# Altium PCB Copy of corePCB1.PcbDoc (part 1 of 2)
Units mil, origin at the board's own origin, x right, y up, seen from the top; angles counter-clockwise.
Board outline 6000 x 4000 mil, 4 copper layers (Top Layer, Layer 1, Layer 2, Bottom Layer), stack 23.756 mil thick; 90 components, 166 nets, 637 pads, 207 vias.
Unrouted connection lines stored in the file: 273.
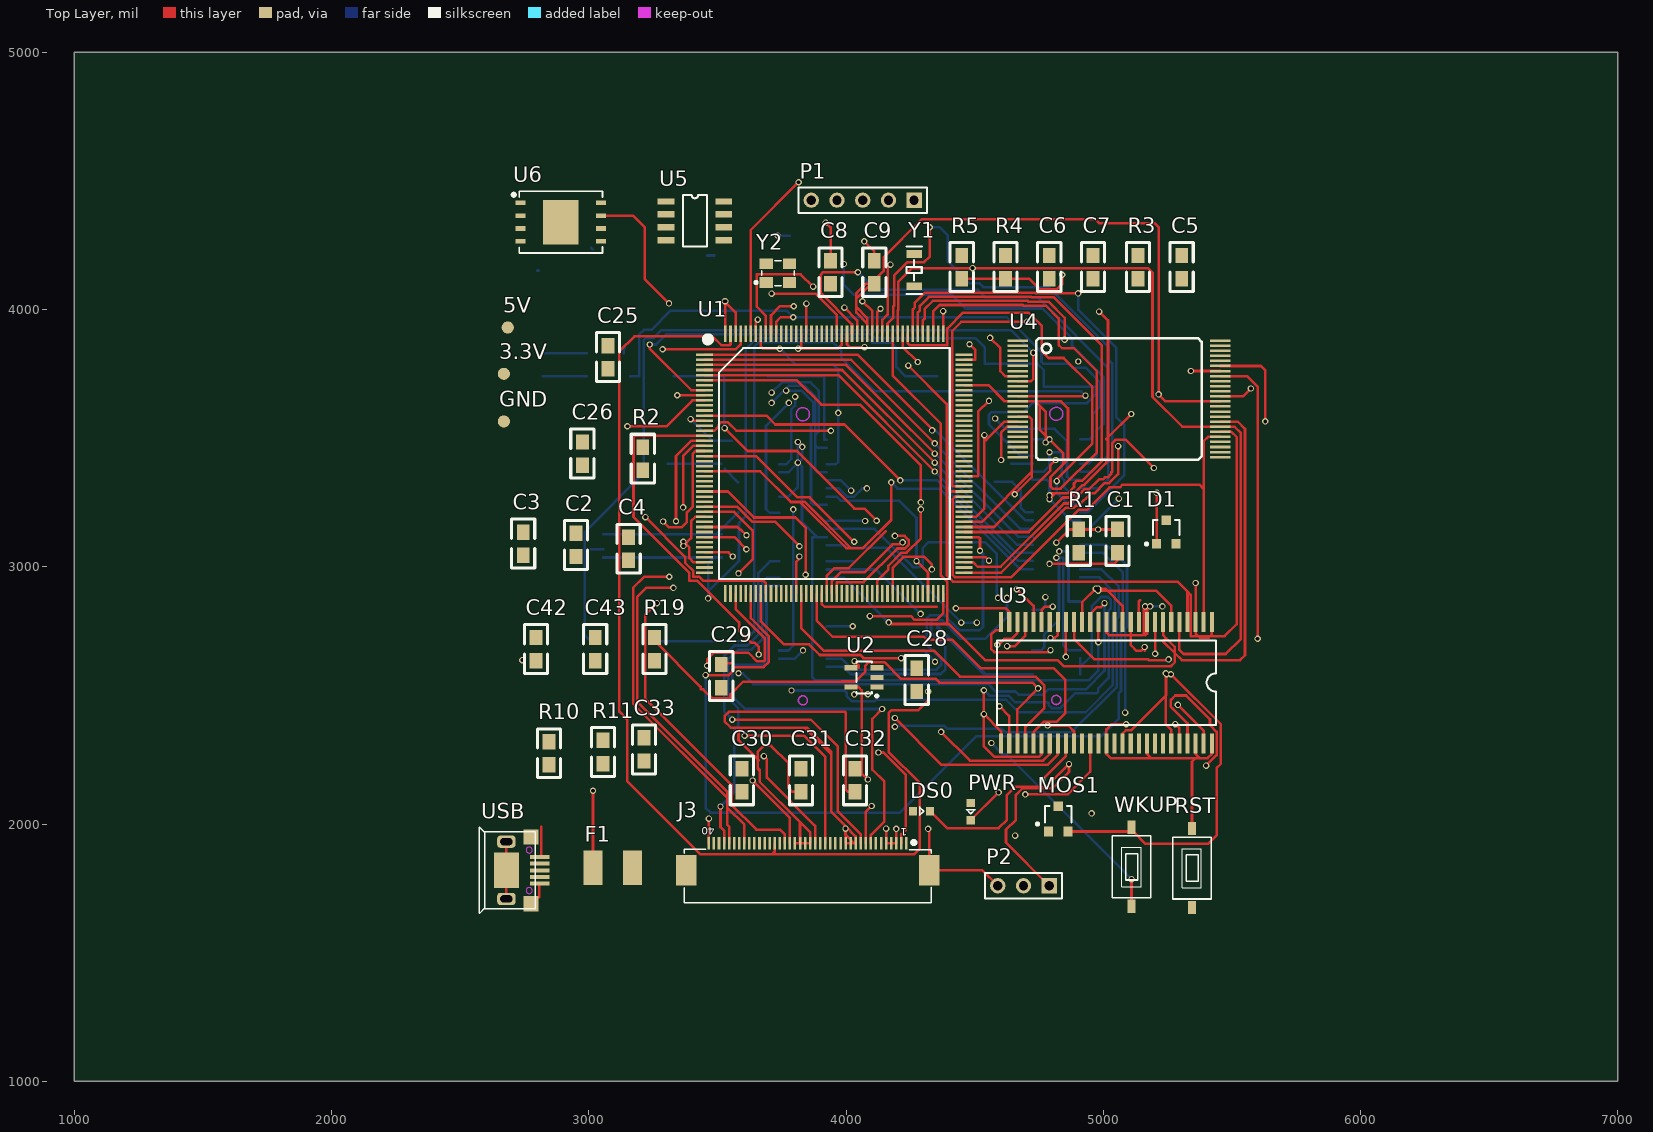
[diagram p0: Top Layer view]
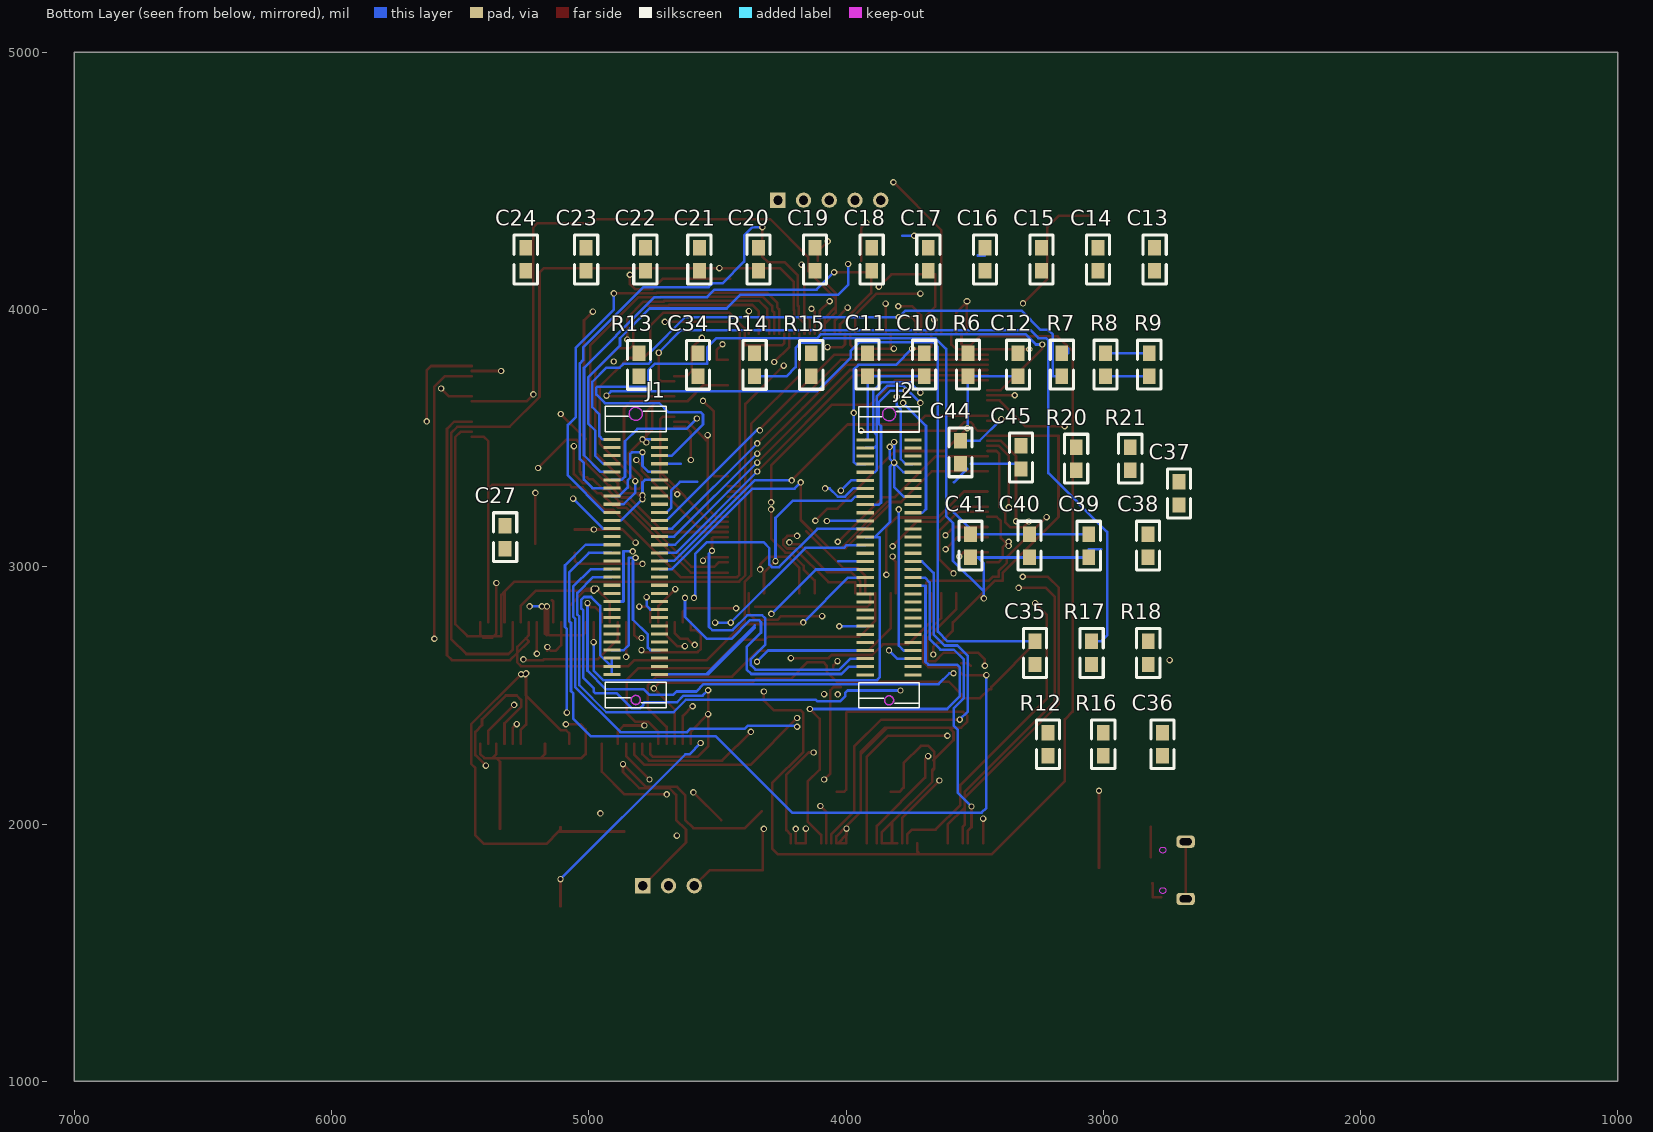
[diagram p1: Bottom Layer view, seen from below]
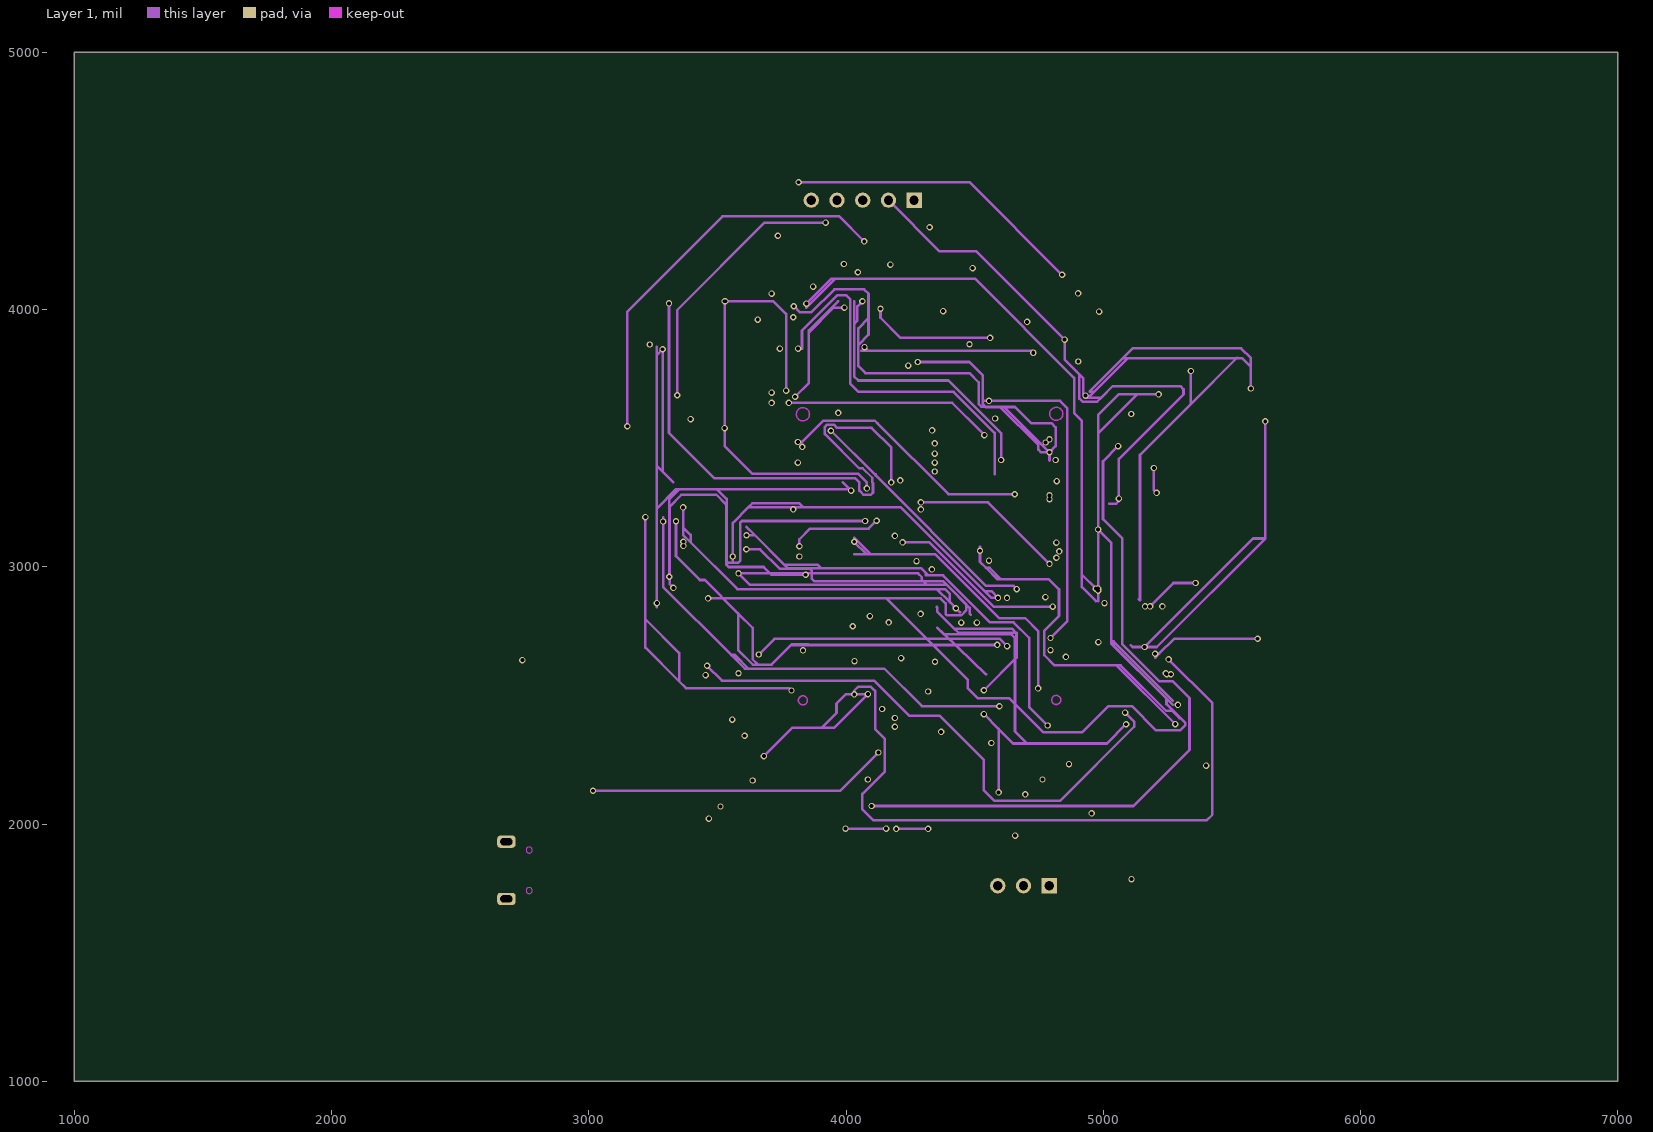
[diagram p2: Layer 1]
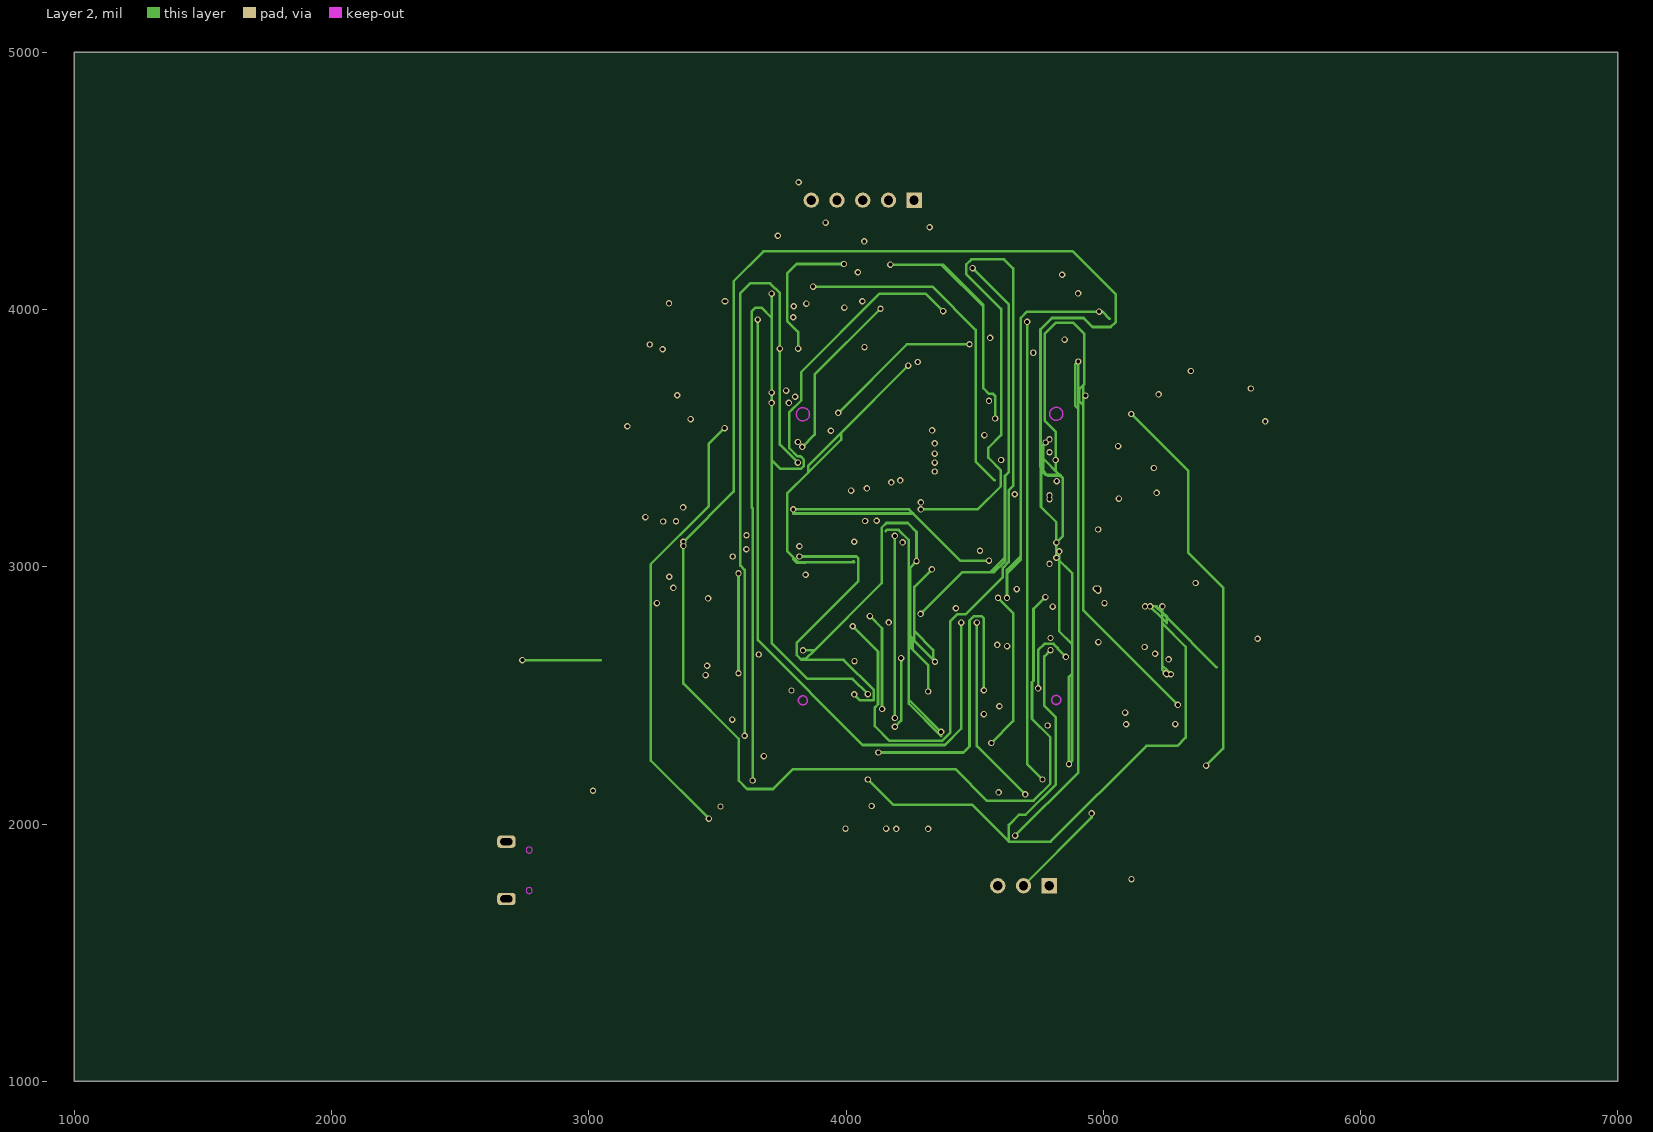
[diagram p3: Layer 2]

## Layer stack, top to bottom
Top Solder: solder mask 0.4, Solder Resist, Dk 3.5
Top Layer: signal copper 1.4
Dielectric 2: prepreg 2.8, PP-006, Dk 4.1
Layer 1: signal copper 1.3779
Dielectric 1: dielectric 12.6, FR-4, Dk 4.8
Layer 2: signal copper 1.3779
Dielectric 3: prepreg 2.8, PP-006, Dk 4.1
Bottom Layer: signal copper 1.4
Bottom Solder: solder mask 0.4, Solder Resist, Dk 3.5

## Board outline
1000,1000 7000,1000 7000,5000 1000,5000

## Design rules (kind name [scope] priority, off if disabled: settings)
Clearance [All] p1: gap=6 ignorepadtopadclearanceinfootprint=TRUE except(0: Arc-Hole Track-Hole SMDPad-Hole THPad-Hole Via-Hole Fill-Hole Poly-Hole Region-Hole Text-Hole)
ComponentClearance [All] p1 off: gap=10 collisioncheckmode=3 verticalgap=10 showdistances=FALSE
DiffPairsRouting [All] p1 off: maxlimit=10 minlimit=10 mostfreqgap=10 toplayer_minwidth=15 toplayer_maxwidth=15 toplayer_prefwidth=15 midlayer1_minwidth=15 midlayer1_maxwidth=15 midlayer1_prefwidth=15 midlayer2_minwidth=15 midlayer2_maxwidth=15 midlayer2_prefwidth=15 bottomlayer_minwidth=15 bottomlayer_maxwidth=15 bottomlayer_prefwidth=15 maxuncoupledlength=500
FanoutControl Fanout_BGA [IsBGA] p1 off: bgadir=Out bgaviamode=Centered fanoutstyle=Auto fanoutdirection=Alternating viagrid=1 // Fanout_BGA (Default Rule)
FanoutControl Fanout_LCC [IsLCC] p2 off: bgadir=Out bgaviamode=Centered fanoutstyle=Auto fanoutdirection=Alternating viagrid=1 // Fanout_LCC (Default Rule)
FanoutControl Fanout_SOIC [IsSOIC] p3 off: bgadir=Out bgaviamode=Centered fanoutstyle=Auto fanoutdirection=Alternating viagrid=1 // Fanout_SOIC (Default Rule)
FanoutControl Fanout_Small [(CompPinCount < 5)] p4 off: bgadir=Out bgaviamode=Centered fanoutstyle=Auto fanoutdirection=OutThenIn viagrid=1 // Fanout_Small (Default Rule)
FanoutControl Fanout_Default [All] p5 off: bgadir=Out bgaviamode=Centered fanoutstyle=Auto fanoutdirection=Alternating viagrid=1 // Fanout_Default (Default Rule)
Height [All] p1 off: minheight=0 maxheight=1000 prefheight=500
PolygonConnect [All] p1: connectstyle=Relief reliefconductorwidth=10 reliefentries=4 polygonreliefangle="90 Angle" airgapwidth=10
RoutingCorners [All] p1 off: cornerstyle=45-Degree minsetback=100 maxsetback=100
RoutingLayers [All] p1 off: top layer_v5=TRUE mid layer 1_v5=TRUE mid layer 2_v5=TRUE bottom layer_v5=TRUE
RoutingPriority [All] p1 off: routingpriority=0
RoutingTopology [All] p1 off: topology=Shortest
RoutingVias [All] p1: holewidth=15 width=25 viastyle="Through Hole" minholewidth=15 minwidth=25 maxholewidth=15 maxwidth=25
SMDToCorner [All] p1: distance=0
SolderMaskExpansion [All] p1: expansion=4
Width [All] p1 off: maxlimit=10 minlimit=10 preferedwidth=10
18 further rules are at their usual default settings.

## Classes and differential pairs
component class stm: C1 C2 C3 C4 C5 C6 C7 C8 C9 C10 C11 C12 C13 C14 C15 C16 C17 C18 C19 C20 C21 C22 C23 C24 C25 C26 C27 D1 J1 J2 P1 R1 R2 R3 R4 R5 R6 R7 R8 R9 RST U1 Y1 Y2
component class mem: C35 C36 C37 C38 C39 C40 C41 C42 C43 C44 C45 R16 R17 R18 R19 R20 R21 U3 U4 U5 U6
component class circuit: 3.3V 5V C28 C29 C30 C31 C32 C33 C34 DS0 F1 GND J3 MOS1 P2 PWR R10 R11 R12 R13 R14 R15 U2 USB WKUP

## Components (designator, comment, footprint, x,y, rotation, side; value= is the part's Value field where it differs from the comment)
3.3V "TEST POINT" TP-1.5 2670,3750 r90 top
5V "TEST POINT" TP-1.5 2685,3930 r0 top
C1 "104" 0805 5055,3055 r90 top
C2 "104" 0805 2950,3040 r90 top
C3 "225" 0805 2745,3045 r90 top
C4 "225" 0805 3155,3025 r90 top
C5 "225" 0805 5305,4120 r90 top
C6 "10uF" 0805 4790,4120 r90 top
C7 "104" 0805 4960,4120 r90 top
C8 "6pF" 0805 3940,4100 r90 top
C9 "6pF" 0805 4110,4100 r90 top
C10 "22pF" 0805 3696.13,3740.59 r90 bottom
C11 "22pF" 0805 3916.13,3740.59 r90 bottom
C12 "104" 0805 3331.13,3740.59 r90 bottom
C13 "104" 0805 2800.13,4150 r90 bottom
C14 "104" 0805 3020.13,4150 r90 bottom
C15 "104" 0805 3240.13,4150 r90 bottom
C16 "104" 0805 3460.13,4150 r90 bottom
C17 "104" 0805 3680.13,4150 r90 bottom
C18 "104" 0805 3900.13,4150 r90 bottom
C19 "104" 0805 4120.13,4150 r90 bottom
C20 "104" 0805 4340.13,4150 r90 bottom
C21 "104" 0805 4570.13,4150 r90 bottom
C22 "104" 0805 4780.13,4150 r90 bottom
C23 "104" 0805 5010.13,4150 r90 bottom
C24 "104" 0805 5245.13,4150 r90 bottom
C25 "104" 0805 3074.94,3770 r90 top
C26 "104" 0805 2975,3395 r90 top
C27 "104" 0805 5325,3070 r90 bottom
C28 "104" 0805 4274.94,2515 r90 top
C29 "10uF" 0805 3514.94,2530 r90 top
C30 "103" 0805 3595,2125 r90 top
C31 "104" 0805 3825,2125 r90 top
C32 "10uF" 0805 4035,2125 r90 top
C33 "104" 0805 3214.94,2245 r90 top
C34 "104" 0805 4575.13,3740 r90 bottom
C35 "104" 0805 3265.13,2620 r90 bottom
C36 "104" 0805 2770.13,2265 r90 bottom
C37 "104" 0805 2705.06,3240 r90 bottom
C38 "104" 0805 2826.45,3036.93 r90 bottom
C39 "104" 0805 3056.45,3036.93 r90 bottom
C40 "104" 0805 3286.45,3036.93 r90 bottom
C41 "104" 0805 3516.45,3036.93 r90 bottom
C42 "104" 0805 2795,2635 r90 top
C43 "104" 0805 3025,2635 r90 top
C44 "104" 0805 3555.13,3400 r90 bottom
C45 "104" 0805 3320.13,3380 r90 bottom
D1 "BAT54C" SOT-23 5245,3130 r0 top
DS0 "LED" SMDLED-0603 4260,2050 r0 top
F1 "1812L075PR" *1812 3093.23,1830 r0 top
GND "TEST POINT" TP-1.5 2670,3565 r90 top
J1 "3710M060046G3FT01" 3710F060046G3FT01 4910,2581.61 r0 bottom
J2 "3710M060046G3FT01" 3710F060046G3FT01 3925.04,2580.04 r0 bottom
J3 "RGBLCD" FPC-TOP40 4234.65,1929 r180 top
MOS1 "SI2301" SO-G3/C2.5 4825,2020 r0 top
P1 "SWD" HDR1X5 4265,4425 r180 top
P2 "USART1" HDR1X3 4790,1760 r180 top
PWR "LED" SMDLED-0603 4485,2081.93 r270 top
R1 "10K" 0805 4905,3055 r90 top
R2 "10R" 0805 3209.94,3375 r90 top
R3 "10R" 0805 5135,4120 r90 top
R4 "0R" 0805 4620,4120 r90 top
R5 "0R" 0805 4450,4120 r90 top
R6 "10K" 0805 3526.13,3740.59 r90 bottom
R7 "100K" 0805 3161.13,3740.59 r90 bottom
R8 "0R" 0805 2991.13,3740.59 r90 bottom
R9 "0R" 0805 2821.13,3740.59 r90 bottom
R10 "1K" 0805 2844.94,2230 r90 top
R11 "10R" 0805 3055,2235 r90 top
R12 "10R" 0805 3215.06,2265 r90 bottom
R13 "10R" 0805 4805.13,3740 r90 bottom
R14 "100K" 0805 4355.13,3740 r90 bottom
R15 "1K" 0805 4135.13,3740 r90 bottom
R16 "0R" 0805 3000.13,2265 r90 bottom
R17 "10K" 0805 3045.13,2620 r90 bottom
R18 "10K" 0805 2825.13,2620 r90 bottom
R19 "10K" 0805 3255,2635 r90 top
R20 "4.7K" 0805 3105.13,3375 r90 bottom
R21 "4.7K" 0805 2895.13,3375 r90 bottom
RST "KEY_M" KEY_SOP3625 5345,1675 r90 top
U1 "STM32F767IGT6" LQFP176 3450,3824.02 r0 top
U2 "CAT6219-330TD" SOT-23-5 4120,2532.6 r180 top
U3 "W9825G6KH" TSOP54 5421.97,2785 r270 top
U4 "MT29F4G08" TSOP48 4667.6,3879.01 r0 top
U5 "24C02" SOP-8 3300.59,4420 r0 top
U6 "W25Q256" WSON8 2891.5,4340 r0 top
USB "USB-AB" "USB_AB - 5S - B" 2595,1820 r90 top
WKUP "KEY_UP" KEY_SOP3625 5110,1680 r90 top
Y1 "32.768KHz" XTAL3215 4265,4090 r90 top
Y2 "25Mhz" XTAL3225 3690,4105 r0 top

## Footprints (in the part's own frame and the unit in brackets; to place one, negate y for a bottom-side part, rotate by r counter-clockwise, add the part's x,y. Pads: shape width x height; smd on the part's side, far side on the other; paste and mask are expansions set on the pad)
0805 [mil]
  rect 60x50 smd: 1(0,-0.06) 2(90,-0.06)
  silkscreen extent -50,-45 140,45
3710F060046G3FT01 [mm]
  rect 1.7x0.3 smd: 1(-4.7,0) 2(-4.7,-0.8) 3(-4.7,-1.6) 4(-4.7,-2.4) 5(-4.7,-3.2) 6(-4.7,-4) 7(-4.7,-4.8) 8(-4.7,-5.6) 9(-4.7,-6.4) 10(-4.7,-7.2) 11(-4.7,-8) 12(-4.7,-8.8) 13(-4.7,-9.6) 14(-4.7,-10.4) 15(-4.7,-11.2) 16(-4.7,-12) 17(-4.7,-12.8) 18(-4.7,-13.6) 19(-4.7,-14.4) 20(-4.7,-15.2) 21(-4.7,-16) 22(-4.7,-16.8) 23(-4.7,-17.6) 24(-4.7,-18.4) 25(-4.7,-19.2) 26(-4.7,-20) 27(-4.7,-20.8) 28(-4.7,-21.6) 29(-4.7,-22.4) 30(-4.7,-23.2) 31(0,-23.2) 32(0,-22.4) 33(0,-21.6) 34(0,-20.8) 35(0,-20) 36(0,-19.2) 37(0,-18.4) 38(0,-17.6) 39(0,-16.8) 40(0,-16) 41(0,-15.2) 42(0,-14.4) 43(0,-13.6) 44(0,-12.8) 45(0,-12) 46(0,-11.2) 47(0,-10.4) 48(0,-9.6) 49(0,-8.8) 50(0,-8) 51(0,-7.2) 52(0,-6.4) 53(0,-5.6) 54(0,-4.8) 55(0,-4) 56(0,-3.2) 57(0,-2.4) 58(0,-1.6) 59(0,-0.8) 60(0,0)
  Keep-Out Layer circle w0.152: c-2.35,-25.725 r0.65
  Keep-Out Layer circle w0.152: c-2.35,2.525 r0.45
  silkscreen extent -5.35,-26.48 0.65,3.27
*1812 [mm]
  rect 1.9x3.4 smd: 1(-1.95,0) 2(1.95,0)
FPC-TOP40 [mm]
  rect 0.25x1.2 smd: 1(0,0.102) 2(0.5,0.102) 3(1,0.102) 4(1.5,0.102) 5(2,0.102) 6(2.5,0.102) 7(3,0.102) 8(3.5,0.102) 9(4,0.102) 10(4.5,0.102) 11(5,0.102) 12(5.5,0.102) 13(6,0.102) 14(6.5,0.102) 15(7,0.102) 16(7.5,0.102) 17(8,0.102) 18(8.5,0.102) 19(9,0.102) 20(9.5,0.102) 21(10,0.102) 22(10.5,0.102) 23(11,0.102) 24(11.5,0.102) 25(12,0.102) 26(12.5,0.102) 27(13,0.102) 28(13.5,0.102) 29(14,0.102) 30(14.5,0.102) 31(15,0.102) 32(15.5,0.102) 33(16,0.102) 34(16.5,0.102) 35(17,0.102) 36(17.5,0.102) 37(18,0.102) 38(18.5,0.102) 39(19,0.102) 40(19.5,0.102)
  rect 2x3 smd: A(-2.25,2.754) B(21.725,2.754)
  silkscreen extent -2.45,-0.15 21.92,5.97
HDR1X3 [mm]
  rect 1.5x1.5 hole 0.9: 1(0,0)
  round 1.5 hole 0.9: 2(2.54,0) 3(5.08,0)
  silkscreen extent -1.27,-1.27 6.35,1.27
HDR1X5 [mm]
  rect 1.5x1.5 hole 0.9: 1(0,0)
  round 1.5 hole 0.9: 2(2.54,0) 3(5.08,0) 4(7.62,0) 5(10.16,0)
  silkscreen extent -1.27,-1.27 11.43,1.27
KEY_SOP3625 [mm]
  rect 1.3x0.8 smd: 1(0,0) 2(7.8,0)
  silkscreen extent 0.85,-1.9 6.95,1.9
LQFP176 [mm]
  rect 1.65x0.254 smd: 1(0,0) 2(0,-0.5) 3(0,-1) 4(0,-1.5) 5(0,-2) 6(0,-2.5) 7(0,-3) 8(0,-3.5) 9(0,-4) 10(0,-4.5) 11(0,-5) 12(0,-5.5) 13(0,-6) 14(0,-6.5) 15(0,-7) 16(0,-7.5) 17(0,-8) 18(0,-8.5) 19(0,-9) 20(0,-9.5) 21(0,-10) 22(0,-10.5) 23(0,-11) 24(0,-11.5) 25(0,-12) 26(0,-12.5) 27(0,-13) 28(0,-13.5) 29(0,-14) 30(0,-14.5) 31(0,-15) 32(0,-15.5) 33(0,-16) 34(0,-16.5) 35(0,-17) 36(0,-17.5) 37(0,-18) 38(0,-18.5) 39(0,-19) 40(0,-19.5) 41(0,-20) 42(0,-20.5) 43(0,-21) 44(0,-21.5) 89(25.631,-21.5) 90(25.631,-21) 91(25.631,-20.5) 92(25.631,-20) 93(25.631,-19.5) 94(25.631,-19) 95(25.631,-18.5) 96(25.631,-18) 97(25.631,-17.5) 98(25.631,-17) 99(25.631,-16.5) 100(25.631,-16) 101(25.631,-15.5) 102(25.631,-15) 103(25.631,-14.5) 104(25.631,-14) 105(25.631,-13.5) 106(25.631,-13) 107(25.631,-12.5) 108(25.631,-12) 109(25.631,-11.5) 110(25.631,-11) 111(25.631,-10.5) 112(25.631,-10) 113(25.631,-9.5) 114(25.631,-9) 115(25.631,-8.5) 116(25.631,-8) 117(25.631,-7.5) 118(25.631,-7) 119(25.631,-6.5) 120(25.631,-6) 121(25.631,-5.5) 122(25.631,-5) 123(25.631,-4.5) 124(25.631,-4) 125(25.631,-3.5) 126(25.631,-3) 127(25.631,-2.5) 128(25.631,-2) 129(25.631,-1.5) 130(25.631,-1) 131(25.631,-0.5) 132(25.631,0)
  rect 0.254x1.65 smd: 45(2.065,-23.566) 46(2.566,-23.566) 47(3.066,-23.566) 48(3.565,-23.566) 49(4.066,-23.566) 50(4.565,-23.566) 51(5.066,-23.566) 52(5.565,-23.566) 53(6.066,-23.566) 54(6.565,-23.566) 55(7.066,-23.566) 56(7.565,-23.566) 57(8.066,-23.566) 58(8.565,-23.566) 59(9.066,-23.566) 60(9.565,-23.566) 61(10.066,-23.566) 62(10.565,-23.566) 63(11.066,-23.566) 64(11.565,-23.566) 65(12.066,-23.566) 66(12.565,-23.566) 67(13.066,-23.566) 68(13.565,-23.566) 69(14.066,-23.566) 70(14.565,-23.566) 71(15.066,-23.566) 72(15.566,-23.566) 73(16.066,-23.566) 74(16.566,-23.566) 75(17.065,-23.566) 76(17.566,-23.566) 77(18.065,-23.566) 78(18.566,-23.566) 79(19.065,-23.566) 80(19.566,-23.566) 81(20.065,-23.566) 82(20.566,-23.566) 83(21.065,-23.566) 84(21.566,-23.566) 85(22.065,-23.566) 86(22.566,-23.566) 87(23.065,-23.566) 88(23.566,-23.566) 133(23.566,2.065) 134(23.065,2.065) 135(22.566,2.065) 136(22.065,2.065) 137(21.566,2.065) 138(21.065,2.065) 139(20.566,2.065) 140(20.065,2.065) 141(19.566,2.065) 142(19.065,2.065) 143(18.566,2.065) 144(18.065,2.065) 145(17.566,2.065) 146(17.065,2.065) 147(16.566,2.065) 148(16.066,2.065) 149(15.566,2.065) 150(15.066,2.065) 151(14.565,2.065) 152(14.066,2.065) 153(13.565,2.065) 154(13.066,2.065) 155(12.565,2.065) 156(12.066,2.065) 157(11.565,2.065) 158(11.066,2.065) 159(10.565,2.065) 160(10.066,2.065) 161(9.565,2.065) 162(9.066,2.065) 163(8.565,2.065) 164(8.066,2.065) 165(7.565,2.065) 166(7.066,2.065) 167(6.565,2.065) 168(6.066,2.065) 169(5.565,2.065) 170(5.066,2.065) 171(4.565,2.065) 172(4.066,2.065) 173(3.565,2.065) 174(3.066,2.065) 175(2.566,2.065) 176(2.065,2.065)
  silkscreen extent 0.04,-22.15 24.22,1.82
SMDLED-0603 [mil]
  rect 32x32 smd: 1(0,0) 2(66.93,0)
  silkscreen extent 26,-17 42,17
SO-G3/C2.5 [mm]
  rect 0.9x0.95 smd: 1(-0.95,-1.25) 2(0.95,-1.25) 3(0,1.25)
  silkscreen extent -2.15,-0.63 1.3,1.25
SOP-8 [mil]
  rect 65x25 smd: 1(0,0) 2(0,-50) 3(0,-100) 4(0,-150) 5(224.41,-150) 6(224.41,-100) 7(224.41,-50) 8(224.41,0)
  silkscreen extent 65,-175 159,25
SOT-23 [mm]
  rect 0.9x0.95 smd: 1(-0.95,-1.048) 2(0.95,-1.048) 3(0,1.302)
  silkscreen extent -2.07,-1.17 1.3,1.3
SOT-23-5 [mil]
  rect 50x20 smd: 1(0,0) 2(0,-37.4) 3(0,-74.8) 4(100,-74.8) 5(100,0)
  silkscreen extent 0,-99 80,35
TP-1.5 [mm]
  round 1.2 smd: 1(0,0)
TSOP48 [mm]
  rect 2x0.25 smd: 1(0,0) 2(0,-0.5) 3(0,-1) 4(0,-1.5) 5(0,-2) 6(0,-2.5) 7(0,-3) 8(0,-3.5) 9(0,-4) 10(0,-4.5) 11(0,-5) 12(0,-5.5) 13(0,-6) 14(0,-6.5) 15(0,-7) 16(0,-7.5) 17(0,-8) 18(0,-8.5) 19(0,-9) 20(0,-9.5) 21(0,-10) 22(0,-10.5) 23(0,-11) 24(0,-11.5) 25(20,-11.5) 26(20,-11) 27(20,-10.5) 28(20,-10) 29(20,-9.5) 30(20,-9) 31(20,-8.5) 32(20,-8) 33(20,-7.5) 34(20,-7) 35(20,-6.5) 36(20,-6) 37(20,-5.5) 38(20,-5) 39(20,-4.5) 40(20,-4) 41(20,-3.5) 42(20,-3) 43(20,-2.5) 44(20,-2) 45(20,-1.5) 46(20,-1) 47(20,-0.5) 48(20,0)
  silkscreen extent 1.83,-11.75 18.17,0.25
TSOP54 [mm]
  rect 2x0.4 smd: 1(0,0) 2(0,-0.8) 3(0,-1.6) 4(0,-2.4) 5(0,-3.2) 6(0,-4) 7(0,-4.8) 8(0,-5.6) 9(0,-6.4) 10(0,-7.2) 11(0,-8) 12(0,-8.8) 13(0,-9.6) 14(0,-10.4) 15(0,-11.2) 16(0,-12) 17(0,-12.8) 18(0,-13.6) 19(0,-14.4) 20(0,-15.2) 21(0,-16) 22(0,-16.8) 23(0,-17.6) 24(0,-18.4) 25(0,-19.2) 26(0,-20) 27(0,-20.8) 28(12,-20.8) 29(12,-20) 30(12,-19.2) 31(12,-18.4) 32(12,-17.6) 33(12,-16.8) 34(12,-16) 35(12,-15.2) 36(12,-14.4) 37(12,-13.6) 38(12,-12.8) 39(12,-12) 40(12,-11.2) 41(12,-10.4) 42(12,-9.6) 43(12,-8.8) 44(12,-8) 45(12,-7.2) 46(12,-6.4) 47(12,-5.6) 48(12,-4.8) 49(12,-4) 50(12,-3.2) 51(12,-2.4) 52(12,-1.6) 53(12,-0.8) 54(12,0)
  silkscreen extent 1.83,-21.2 10.16,0.4
"USB_AB - 5S - B" [mm]
  rect 0.4x1.9 smd: 1(1.3,-5.436) 2(0.65,-5.436) 3(0,-5.436) 4(-0.65,-5.436) 5(-1.3,-5.436)
  rrect50% 1.2x1.8 hole 0.7 slot 1.2 at 90 deg: 6(2.825,-2.15) 7(-2.825,-2.15)
  rect 1.5x1.5 smd: 8(-3.302,-4.572) 9(3.302,-4.572)
  rect 3.5x2.5 smd: 9(0,-2.159)
  Keep-Out Layer circle w0.102: c2,-4.4 r0.3
  Keep-Out Layer circle w0.102: c-2,-4.4 r0.3
  silkscreen extent -4.26,-5 4.26,0.51
WSON8 [mm]
  rect 1x0.45 smd: 1(-3.975,1.905) 2(-3.975,0.635) 3(-3.975,-0.635) 4(-3.975,-1.905) 5(3.975,-1.905) 6(3.975,-0.635) 7(3.975,0.635) 8(3.975,1.905)
  rect 3.5x4.4 smd: 9(0,0)
  silkscreen extent -4.8,-3.05 4.1,3.05
XTAL3215 [mm]
  rect 0.75x1.5 smd: 1(0,0) 2(3.2,0)
  silkscreen extent -0.74,-0.75 3.94,0.75
XTAL3225 [mm]
  rect 1.3x1.05 smd: 1(0,0) 2(2.3,0) 3(2.3,1.85) 4(0,1.85)
  silkscreen extent -1.14,-0.33 2.74,2.17

## Part data
3.3V 5V GND: library part TEST-POINT, "测试点"
C1 C2 C3 C4 C5 C6 C7 C8 C9 C10 C11 C12 C13 C14 C15 C16 C17 C18 C19 C20 C21 C22 C23 C24 C25 C26 C27 C28 C29 C30 C31 C32 C33 C34 C35 C36 C37 C38 C39 C40 C41 C42 C43 C44 C45: library part C
D1: "双肖特基二极管"
F1: "PTC Resettable Fuse 0.75A_hold_ 1.5A_trip_ 13.2VDC 100A 0.8W 0.2s 0.1Ohm SMD Solder Pad 1812 T/R", Package="1812 Littelfuse", Availability=Unavailable, MF="Littelfuse Inc.", MP=1812L075PR, Price=None, SnapEDA_Link=https://www.snapeda.com/parts/1812L075PR/Littelfuse%20Inc./view-part/?ref=snap
J1 J2: library part 3710F, "3710F060046G3FT01"
J3: library part FPC-40, "FPC-40P-0.5mm"
MOS1: library part MOS-P, "IRLML6401/SI2301"
P1: library part "Header 5", "Header, 5-Pin", LatestRevisionDate=17-Jul-2002, LatestRevisionNote="Re-released for DXP Platform.", Publisher="Altium Limited"
P2: library part "Header 3", "Header, 3-Pin", LatestRevisionDate=17-Jul-2002, LatestRevisionNote="Re-released for DXP Platform.", Publisher="Altium Limited"
R1 R2 R3 R4 R5 R6 R7 R8 R9 R10 R11 R12 R13 R14 R15 R16 R17 R18 R19 R20 R21: library part R
U2: "3.3V 500mA LDO"
U3: library part IS42S16160B, "32MB SDRAM"
U4: library part K9F2G08U0C, "256MB NAND FLASH"
U5: library part 24C256, "EEPROM"
U6: library part W25Q128, "W25Q128"
USB: "MicroUSB"
WKUP: library part KEY_M
Y1: library part XTAL, "普通晶振"
Y2: library part XTAL_3225, "3225贴片无源晶振"

## Via types
v1: diameter 25, hole 15, Top Layer to Bottom Layer, 207 vias

## Nets (pads, with @x,y where several pads share a name; then routed paths per layer and width w, separated by ;. In a path a pad name is that pad's centre, name@x,y a point inside that pad or via, vN(x,y) a via of type N, cw(c..) or ccw(c..) an arc to the next point about the centre after c; other vN are vias at no path point)
1WIRE_DQ: J2.4 U1.92 | length 2003.9
  Top Layer w10: U1.92@4459.09,3036.61 4543.39,3036.61 v1(4556,3024)
  Layer 2 w10: 3795,3207 4261,3207 ; v1(3795,3223) 4245,3223 4261,3207 ; v1(4556,3024) 4444,3024 4261,3207
  Bottom Layer w10: J2.4@3740,2674.53 3776,2674.53 3795,2693.53 v1(3795,3223)
BOOT0: J1.31 R7.1 U1.166 | length 2561.2
  Top Layer w10: U1.166@3728.17,3905.33 3728.17,3952 3746.17,3970 v1(3795,3970)
  Bottom Layer w10: R7.1@3161.07,3740.59 3197.07,3740.59 3197.07,3904 3214.07,3921 3243,3921 3318,3996 3769,3996 v1(3795,3970) 4625,3970 4760,3835 4760,3797 4768,3789 4865,3789 4879.5,3774.5 4930.16,3774.5 4986.5,3718.16 4986.5,3620.39 4958.84,3592.73 4958.84,3507.84 4946,3495 J1.31@4910,3495
DCMI_D0: J2.16 U1.115
DCMI_D1: J2.17 U1.116
DCMI_D2: J2.18 U1.117
DCMI_D3: J2.19 U1.118
DCMI_D4: J1.39 U1.140 | length 1604.4
  Top Layer w10: U1.140@4239.98,3905.33 4239.98,3869.02 4248,3861 4394,3861 4394,3927 4454.68,3987.68 4710.04,3987.68 4761.72,3936 4761.72,3837.09 4787.31,3811.5 4846.35,3811.5 4958.02,3699.83 4958.02,3479.5 4822,3343.48 4822,3335.97 v1(4819.03,3333)
  Bottom Layer w10: v1(4819.03,3333) 4819.03,3289 4865,3243.03 J1.39@4910,3243.03
DCMI_D5: J1.36 U1.145 | length 1919.6
  Top Layer w10: U1.145@4141.56,3905.33 4141.56,3960.3 4162.06,3980.81 4162.06,4164.23 v1(4172.42,4174.58)
  Layer 2 w10: v1(4172.42,4174.58) 4370.21,4174.58 ; v1(4579.5,3576.5) 4579.5,3664 4571.5,3672 4556,3672 4534,3694 4534,4010.79 ; 4370.21,4174.58 4377.42,4174.58 4534,4018 4534,4010.79 ; 4370.21,4174.58 4534,4010.79
  Bottom Layer w10: v1(4579.5,3576.5) 4620,3536 4811,3536 4859,3488 4859,3350.52 4872,3337.52 J1.36@4910,3337.52
DCMI_D6: J1.26 U1.167 | length 2305.1
  Top Layer w10: U1.167@3708.48,3905.33 3708.48,3977.48 3744,4013 v1(3797,4013)
  Layer 1 w10: v1(3797,4013) 3821,3989 3864.79,3989 3954.54,4078.74 4070.76,4078.74 4087.5,4062 4087.5,3966.5 ; 4791,3413 v1(4791,3445) ; 4048,3863 4048,3927 4087.5,3966.5 ; 4048,3863 4048,3780 4075,3753 4480,3753 4516,3717 4516,3632.33 4527,3621.33 4598.67,3621.33 ; 4048,3863 4087.5,3902.5 4087.5,3966.5 ; 4598.67,3621.33 4614.67,3621.33 v1(4791,3445) ; 4598.67,3621.33 4747.54,3472.46 4747.54,3456 4758.54,3445 v1(4791,3445)
  Bottom Layer w10: J1.26@4724.96,3369.02 4768.02,3369.02 4791,3392 v1(4791,3445)
DCMI_D7: J1.27 U1.168 | length 1885.1
  Top Layer w10: U1.168@3688.8,3905.33 3688.8,3975.2 3653,4011 3653,4137 3824,4137 v1(3872,4089)
  Layer 2 w10: v1(3872,4089) 4336,4089 4504,3921 4504,3410 4578,3336
  Bottom Layer w10: 4642.51,3400.51 J1.27@4724.96,3400.51
DCMI_HREF: J2.3 U1.85 | length 1208
  Top Layer w10: v1(4274,3022) 4318.72,2977.28 U1.85@4318.72,2896.24
  Layer 2 w10: 3832.95,2643.03 3845.06,2643.03 3877.06,2675.03 ; v1(3832.95,2675.03) 3877.06,2675.03 ; v1(4274,3022) 4274,3136 4240,3170 4157,3170 4139,3152 4139,2936.97 3877.06,2675.03
  Bottom Layer w10: J2.3@3740,2643.03 3800.95,2643.03 v1(3832.95,2675.03)
DCMI_PLCK: J1.47 U1.52 | length 2508.4
  Top Layer w10: U1.52@3669.11,2896.24 3669.11,2788 3758.58,2698.53 3856.45,2698.53 3897.98,2657 4056,2657 4068,2645 v1(4214,2645)
  Layer 2 w10: v1(4190,2378) 4214,2402 v1(4214,2645)
  Bottom Layer w10: v1(4190,2378) 4193.5,2381.5 4382.5,2381.5 4393.5,2370.5 4604.5,2370.5 4618,2357 4877.13,2357 5053,2532.87 5053,2798.27 5060.5,2805.77 5060.5,2922.56 4992,2991.06 J1.47@4910,2991.06
DCMI_RESET: J1.25 J1.41 U1.138 U1.165 | length 1935.1
  Top Layer w10: U1.138@4279.35,3905.33 4279.35,3988.35 4287.44,3996.44 4287.44,4014.6 4322.34,4049.5 4719.56,4049.5 4722.06,4047 4807.72,4047 4995,3859.72 4995,3411.16 4917.46,3333.62 4896,3333.62 4886.33,3323.96 4886.33,3309.57 4862.13,3285.36 4813.36,3285.36 ; v1(4791,3263) 4813.36,3285.36 ; v1(4791,3277.5) 4798.86,3285.36 4813.36,3285.36
  Bottom Layer w10: J1.25@4724.96,3337.52 4781.48,3337.52 4791,3328 v1(4791,3277.5) ; v1(4791,3263) 4873.96,3180.04 J1.41@4910,3180.04
DCMI_SCL: J1.22 U1.162
DCMI_SDA: J1.21 U1.161 | length 1746
  Top Layer w10: 3826.59,3850.41 U1.161@3826.59,3905.33
  Layer 1 w10: 3826.59,3850.41 3829,3848 3829,3918 3967,4056 4000,4056 4017.26,4038.74 4017.26,3974.26 4016,3973 4016,3712 4048,3680 4418,3680 4578,3520 4578,3359
  Bottom Layer w10: 4578,3330 4646,3330 4680,3296 4680,3228.94 4697.4,3211.54 J1.21@4724.96,3211.54
DCMI_XCLK: J2.20 U1.119
ETH_MDC: J1.9 U1.33 | length 3369.8
  Top Layer w10: v1(3368,3081) 3398,3111 3398,3178.09 3414,3194.09 U1.33@3450,3194.09
  Layer 2 w10: v1(3368,3081) 3368,2546 3583,2331 3583,2169 3616,2136 3717,2136 3794,2213 4425,2213 4547,2091 4729,2091 4794,2156 4794,2338 4723,2409 4723,2551 4729,2557 4729,2836 v1(4775,2882)
  Bottom Layer w10: J1.9@4724.96,2833.58 4760,2833.58 4775,2848.58 v1(4775,2882)
ETH_MDIO: J1.4 U1.42 | length 4616.6
  Top Layer w10: v1(3368,3097) 3391,3074 3391,3033.93 3408,3016.93 U1.42@3450,3016.93
  Layer 2 w10: v1(3368,3097) 3563,3292 3563,4110 3679,4226 4882,4226 5049,4059 5049,3952 5029,3932 4959,3932 4924,3967 4800,3967 4756,3923 4756,3389 4758,3387 4758,3233 4818,3173 v1(4818,3035)
  Bottom Layer w10: J1.4@4724.96,2676.1 4760,2676.1 4770,2686.1 4770,2736 4828,2794 4828,3025 v1(4818,3035)
FMC_A0: U1.16 U3.23 | length 1668.1
  Top Layer w10: U1.16@3450,3528.74 3488,3528.74 3504.5,3545.24 3504.5,3552 3515,3562.5 3539.86,3562.5 3573.62,3528.74 v1(3941.26,3528.74) ; v1(4663.68,2913.37) 4729.05,2848 U3.23@4729.05,2785
  Layer 1 w10: v1@3947.33,3528.74 v1(3941.26,3528.74) 4116.07,3353.93 ; 4116.07,3360 4116.07,3353.93 ; v1(4663.68,2913.37) 4651.03,2926.02 4543.98,2926.02 4116.07,3353.93
FMC_A1: U1.17 U3.24 | length 2496.5
  Top Layer w10: U1.17@3450,3509.06 3174,3509.06 3174,3194 3390.48,2977.52 3390.48,2945.56 3422.44,2945.56 3584.48,2783.52 3584.48,2752 3631.26,2705.22 3643.78,2705.22 3661,2688 v1(3661,2659) ; v1(4626.42,2691.52) 4656.52,2691.52 4697.56,2732.56 U3.24@4697.56,2785
  Layer 1 w10: v1(3661,2659) 3721.5,2719.5 4598.45,2719.5 v1(4626.42,2691.52)
FMC_A2: U1.18 U3.25 | length 2507
  Top Layer w10: v1(3339,3177) 3339,3430.74 3397.63,3489.37 U1.18@3450,3489.37 ; v1(4588,2696) 4592.49,2696 4616,2719.51 4643.51,2719.51 4666.06,2742.06 U3.25@4666.06,2785
  Layer 1 w10: v1(3339,3177) 3339,3041.18 3431.66,2948.52 3451.48,2948.52 3581,2819 ; v1(4588,2696) 3856.45,2696 ; 3581,2819 3637.5,2762.5 3637.5,2640 3658,2619.5 ; 3581,2819 3581,2676 3637.5,2619.5 3658,2619.5 ; 3658,2619.5 3710.53,2619.5 3787.03,2696 ; 3787.03,2696 3856.45,2696 ; 3787.03,2696 3789.56,2698.53 3853.92,2698.53 3856.45,2696
FMC_A3: U1.19 U3.26 | length 2020.1
  Top Layer w10: v1(3367,3231) 3367,3430.69 3406,3469.69 U1.19@3450,3469.69 ; v1(4427.37,2838.5) 4621.5,2838.5 4634.57,2825.43 U3.26@4634.57,2785
  Layer 1 w10: v1(3367,3231) 3367,3152.64 ; 4443.37,2822.5 v1(4427.37,2838.5) 4403.55,2862.32 ; 3367,3152.64 3395.64,3124 3395.64,3095.36 ; 3367,3152.64 3367,3124 3395.64,3095.36 ; 3395.64,3095.36 3577.66,2913.34 4352.53,2913.34 ; 4352.53,2913.34 4384.48,2913.34 4403.55,2894.27 4403.55,2862.32 ; 4352.53,2913.34 4403.55,2862.32
FMC_A4: U1.20 U3.29 | length 2455.9
  Top Layer w10: v1(3289,3176) 3312,3153 3360,3153 3381.28,3174.28 3381.28,3210.96 3405,3234.67 3405,3440 3415,3450 U1.20@3450,3450 ; v1(4596.57,2458) 4634.57,2420 U3.29@4634.57,2312.56
  Layer 1 w10: 3289,3192 v1(3289,3176) 3289,2922 3554,2657 ; v1(4596.57,2458) 4295,2458 4149.5,2603.5 3621.5,2603.5 ; 3554,2657 3607.5,2603.5 3621.5,2603.5 ; 3554,2657 3568,2657 3621.5,2603.5
FMC_A5: U1.21 U3.30 | length 2188.2
  Top Layer w10: U1.21@3450,3430.32 3650.68,3430.32 3810.97,3270.03 3858.97,3270.03 v1(4032,3097) ; U3.30@4666.06,2312.56 4666.06,2446.06 v1(4747,2527)
  Layer 1 w10: 4032,3049 4080,3049 ; v1(4032,3097) 4080,3049 ; 4032,3113 4096,3049 ; v1(4747,2527) 4747,2749.87 4696.87,2800 4595.06,2800 4346.06,3049 4096,3049 ; 4080,3049 4096,3049
FMC_A6: U1.60 U3.31 | length 1428.2
  Top Layer w10: U1.60@3826.59,2896.24 3826.59,2760.39 3912.98,2674 4342,2674 4443,2573 4736,2573 4771,2538 4771,2450.44 4697.56,2377 U3.31@4697.56,2312.56
FMC_A7: U1.63 U3.32 | length 1496.7
  Top Layer w10: U1.63@3885.65,2896.24 3885.65,2790.35 3948,2728 4303,2728 4314.5,2716.5 4412.81,2716.5 4524.31,2605 4808,2605 4853,2560 4853,2432 4818,2397 4768,2397 4729.05,2358.05 U3.32@4729.05,2312.56
FMC_A8: U1.64 U3.33 | length 1884.1
  Top Layer w10: U1.64@3905.33,2896.24 3905.33,2856 3917.33,2844 4352,2844 ; v1(4536,2520) 4536,2302 4576,2262 4752,2262 4760.55,2270.55 U3.33@4760.55,2312.56
  Layer 1 w10: 4352,2844 4354,2842 4354,2826 4420.5,2759.5 ; v1(4536,2520) 4662.75,2646.75 4662.75,2741.25 ; 4420.5,2759.5 4436.5,2743.5 4660.5,2743.5 ; 4420.5,2759.5 4644.5,2759.5 4660.5,2743.5 ; 4660.5,2743.5 4662.75,2741.25 ; 4660.5,2743.5 4662.75,2743.5 4662.75,2741.25
FMC_A9: U1.65 U3.34 | length 1990.5
  Top Layer w10: U1.65@3925.02,2896.24 3925.02,2964.02 3955.5,2994.5 4010.73,2994.5 4155,3138.77 ; v1(4370,2358) 4482,2246 4766.05,2246 4792.05,2272 U3.34@4792.05,2312.56
  Layer 2 w10: 4155,3138.77 4155,3140 4158.5,3143.5 4204.73,3143.5 4244,3104.23 4244,2484 ; 4370,2342 4244,2468 4244,2484 ; v1(4370,2358) 4244,2484
FMC_A10: U1.66 U3.22 | length 1169
  Top Layer w10: U1.66@3944.7,2896.24 3944.7,2944 3979.2,2978.5 4071.55,2978.5 4180.12,3087.07 4212.07,3087.07 v1(4220,3095) ; U3.22@4760.55,2785 4760.55,2832 4773.55,2845 v1(4804,2845)
  Layer 1 w10: v1(4220,3095) 4324,3095 4574,2845 v1(4804,2845)
FMC_A11: U1.67 U3.35 | length 1938.7
  Top Layer w10: U1.67@3964.39,2896.24 3964.39,2940 4068.62,2940 4199.69,3071.07 4229.3,3071.07 4243.5,3085.27 4243.5,3104.73 4228.23,3120 v1(4190,3120) ; v1(4190,2412) 4372,2230 4784,2230 4823.54,2269.54 U3.35@4823.54,2312.56
  Layer 2 w10: v1(4190,2412) v1(4190,3120)
FMC_A12: U1.106 U3.36 | length 2936.3
  Top Layer w10: U1.106@4459.09,3312.21 4415,3312.21 4413,3314.21 4413,3917 4448,3952 v1(4704,3952) ; v1(4764,2173) 4855.04,2264.04 U3.36@4855.04,2312.56
  Layer 2 w10: v1(4704,3952) 4704,2233 v1(4764,2173)
FMC_A16_CLE: J2.23 U1.99 U4.16 | length 1980.1
  Top Layer w10: U1.99@4459.09,3174.41 4528.41,3174.41 4722,3368 ; v1(4656,3282) 4722,3348 4722,3368 ; U4.16@4667.6,3583.74 4712,3583.74 4722,3573.74 4722,3368
  Layer 1 w10: v1(3813,3485) 3829,3485 3901,3557 3912.24,3568.24 4111.76,3568.24 4123,3557 4398,3282 v1(4656,3282)
  Bottom Layer w10: J2.23@3740,3272.95 3776,3272.95 3813,3309.95 v1(3813,3485)
FMC_A17_ALE: J2.21 U1.100 U4.17 | length 1856
  Top Layer w10: U1.100@4459.09,3194.09 4506.09,3194.09 4538,3226 4538,3492.05 ; v1(4538,3512) 4538,3492.05 ; U4.17@4667.6,3564.05 4617,3564.05 4545,3492.05 4538,3492.05
  Layer 1 w10: v1(3778,3637) 4268,3637 4413,3637 4522,3528 v1(4538,3512)
  Bottom Layer w10: J2.21@3740,3209.96 3703.04,3209.96 3689,3224 3689,3548 v1(3778,3637)
FMC_A18: J2.14 U1.101
FMC_BA0: U1.108 U3.20 | length 1699.7
  Top Layer w10: U1.108@4459.09,3351.58 4511,3351.58 4514,3354.58 4514,3603 v1(4556,3645) ; v1(4795,2723) 4811,2723 4823.54,2735.54 U3.20@4823.54,2785
  Layer 1 w10: 4540,3645 v1(4556,3645) 4832,3645 4860,3617 4860,2788 v1(4795,2723)
FMC_BA1: U1.109 U3.21
FMC_D0: J2.45 U1.104 U3.2 U4.29 | length 2252.8
  Top Layer w10: U1.104@4459.09,3272.83 4423.83,3272.83 4415,3264 4415,2968 4423,2960 4643,2960 4904.36,3221.36 4936.36,3221.36 5023.99,3308.99 5064.47,3308.99 5074.64,3319.16 5373.84,3319.16 5390.47,3302.53 ; U3.2@5390.47,2785 5390.47,3302.53 ; U4.29@5455,3505 5407.47,3505 5390.47,3488 5390.47,3302.53
FMC_D1: J2.46 U1.105 U3.4 U4.30 | length 4787.2
  Top Layer w10: v1(4242,3782) 4391,3633 4391,3312 ; U1.105@4459.09,3292.52 4410.48,3292.52 4391,3312 ; U3.4@5327.48,2785 5327.48,2903.52 ; U4.30@5455,3524.68 5498.32,3524.68 5519,3504 5519,2777 5472,2730 5340,2730 5340,2891 5327.48,2903.52 ; 4391,3312 4391,2967 4416,2942 5289,2942 5327.48,2903.52
  Layer 2 w10: v1(4242,3782) 3980.76,3520.76 ; 3795.5,3036.5 3814,3018 3844,3018 ; 3795.5,3036.5 3771,3061 3771,3284 3852.5,3365.5 ; 3795.5,3036.5 3795.5,3029 3808,3016.5 3842.5,3016.5 3844,3018 ; 3844,3018 4029.02,3018 ; 3852.5,3365.5 3980.76,3493.76 3980.76,3520.76 ; 3852.5,3365.5 3852.5,3392.5 3980.76,3520.76 ; 4029.02,3018 4032,3018 4029.02,3020.98 4029.02,3018
  Bottom Layer w10: J2.46@3925.04,3020.98 4029.02,3020.98
FMC_D2: J2.47 U1.142 U3.5 U4.31 | length 5688.2
  Top Layer w10: U1.142@4200.61,3905.33 4200.61,3995.53 4202.8,3997.72 4202.8,4107.8 4256,4161 v1(4492,4161) 5174.5,4161 5191.5,4144 5191.5,3660.27 5307.4,3544.37 U4.31@5455,3544.37 5510.63,3544.37 5535,3520 5535,2720 5476,2661 5312,2661 5295.98,2677.02 U3.5@5295.98,2785
  Layer 2 w10: v1(4290,2817) 4452,2979 4562.06,2979 ; v1(4492,4161) 4633.5,4019.5 4633.5,3368.5 4618,3353 4618,3305.5 ; 4562.06,2979 4576,2979 4618,3021 4618,3305.5 ; 4562.06,2979 4616.5,3033.44 4616.5,3304 4618,3305.5
  Bottom Layer w10: J2.47@3925.04,2989.49 4117.51,2989.49 v1(4290,2817)
FMC_D3: J2.48 U1.143 U3.7 U4.32 | length 4253.3
  Top Layer w10: v1(4165.99,2784) 4172.49,2777.5 4394,2777.5 ; U1.143@4180.93,3905.33 4180.93,3744.07 4369,3556 4369,2966 4394,2941 4394,2777.5 ; U3.7@5232.99,2785 5232.99,2734 5244.89,2722.1 ; U4.32@5455,3564.05 5522.95,3564.05 5551,3536 5551,2656 5532,2637 5306.2,2637 5278,2665.2 ; 4394,2777.5 4400.5,2777.5 4541,2637 4823.01,2637 4846.01,2614 5263.53,2614 5278,2628.47 5278,2665.2 ; 5244.89,2722.1 5278,2688.99 5278,2665.2 ; 5244.89,2722.1 5232.99,2710.21 5278,2665.2
  Bottom Layer w10: J2.48@3925.04,2957.99 3992,2957.99 v1(4165.99,2784)
FMC_D4: J2.49 U1.68 U3.8 U4.41 | length 1710.4
  Top Layer w10: v1(5201.5,2662) U3.8@5201.5,2785 ; U4.41@5455,3741.22 5559.01,3741.22 5600,3700.23 v1(5600,2720)
  Layer 1 w10: 5201.5,2646 5217.5,2662 ; v1(5201.5,2662) 5217.5,2662 ; v1(5600,2720) 5275.5,2720 5217.5,2662
FMC_D5: J2.50 U1.69 U3.10 U4.42 | length 1434.8
  Top Layer w10: U3.10@5138.5,2785 5138.5,2865 5143,2869.5 ; v1(5340.96,3760.9) U4.42@5455,3760.9
  Layer 1 w10: 5138.5,2874.5 5143,2879 ; 5143,2869.5 5143,2879 ; v1(5340.96,3760.9) 5340.96,3632.96 ; 5521,3813 5340.96,3632.96 ; 5143,2879 5143,3435 5340.96,3632.96
FMC_D6: J2.51 U1.70 U3.11 U4.43 | length 2354.6
  Top Layer w10: U3.11@5107.01,2785 5107.01,2695 5129.01,2673 5146.01,2673 v1(5161.01,2688) 5161.01,2673 ; U4.43@5455,3780.59 5613.27,3780.59 5630,3763.86 v1(5630,3565)
  Layer 1 w10: 5107.01,2695 5114.01,2688 v1(5161.01,2688) ; v1(5630,3565) 5630,3109.99 ; v1(5161.01,2688) 5208.01,2688 5630,3109.99 ; v1(5161.01,2688) 5583,3109.99 5630,3109.99
FMC_D7: J2.52 U1.73 U3.13 U4.44
FMC_D8: J2.53 U1.74 U3.42
FMC_D9: J2.54 U1.75 U3.44 | length 4713.2
  Top Layer w10: U1.75@4121.87,2896.24 4121.87,2947 4164.93,2990.06 4164.93,3003.93 4216,3055 4235.86,3055 4291,3110.14 v1(4291,3223)
  Layer 2 w10: v1(4026,2769.02) 4124.5,2670.52 4124.5,2465.5 4112,2453 4112,2380 4169,2323 4374,2323 4405,2354 4405,2788 4432,2815 4465,2815 4610,2960 4610,2995.44 4632.5,3017.94 4632.5,3297 4650,3314.5 4650,4160 4615,4195 4487,4195 4468,4176 4468,4137 4603,4002 4603,3512 4553,3462 4553,3424 4602,3375 4602,3313 4512,3223 v1(4291,3223)
  Bottom Layer w10: J2.54@3925.04,2769.02 v1(4026,2769.02)
FMC_D10: J2.55 U1.76 U3.45
FMC_D11: J2.56 U1.77 U3.47
FMC_D12: J2.57 U1.78 U3.48 | length 1301.6
  Top Layer w10: U1.78@4180.93,2896.24 4180.93,2995.93 4223.34,3038.34 4304.66,3038.34 4334,3009 v1(4334,2990)
  Layer 2 w10: v1(4334,2990) 4266,2922 4266,2749.5 ; v1(4346,2631) v1@4338.38,2638.62 ; 4266,2749.5 4266,2711 v1@4338.38,2638.62 ; 4266,2749.5 4338.38,2677.12 v1@4338.38,2638.62
  Bottom Layer w10: J2.57@3925.04,2674.53 4302.47,2674.53 v1(4346,2631)
FMC_D13: J2.58 U1.96 U3.50 | length 3139.5
  Top Layer w10: U1.96@4459.09,3115.35 4516,3115.35 4521,3110.35 v1(4521,3062.35) ; v1(5279.98,2388.5) 5295.98,2372.5 U3.50@5295.98,2312.56
  Layer 1 w10: 4521,3078.35 v1(4521,3062.35) 4521,3019 4543.82,2996.18 ; v1(5279.98,2388.5) 5051.48,2617 ; 5295.98,2412 5268.48,2439.5 5244.98,2439.5 5067.48,2617 5051.48,2617 ; 4543.82,2996.18 4589,2951 4603,2951 ; 4543.82,2996.18 4557.82,2996.18 4603,2951 ; 4603,2951 4789,2951 4828,2912 4828,2808.46 4771,2751.46 4771,2656 4810,2617 5051.48,2617
  Bottom Layer w10: J2.58@3925.04,2643.03 3982.97,2643.03 4026,2600 4352,2600 4370,2618 4370,2641 4314.5,2696.5 4314.5,2800 4326,2811.5 4383.35,2811.5 4440.85,2754 4520,2754 4532.5,2766.5 4532.5,3050.85 v1(4521,3062.35)
FMC_D14: J2.59 U1.97 U3.51 | length 6924.7
  Top Layer w10: U1.97@4459.09,3135.04 4709.96,3135.04 4844.28,3269.36 4871.93,3269.36 4920.19,3317.62 4925.1,3317.62 5011,3403.52 5011,3411.02 5018.5,3411.02 5018.5,3496 ; v1(4984,3992) 5018.5,3957.5 5018.5,3503.5 ; v1(5109,3594) 5018.5,3503.5 ; U3.51@5327.48,2312.56 5327.48,2391 5263,2455.48 5263,2482.49 5280,2499.49 5322.63,2499.49 5415,2407.12 5415,2384 5440.84,2358.16 5440.84,2267.84 v1(5400,2227) ; 5018.5,3496 5018.5,3503.5 ; 5018.5,3496 5011,3496 5018.5,3503.5
  Layer 1 w10: 5271,2463 5040,2694 5040,2710 5271,2479
  Layer 2 w10: v1(4626,2879) 4626,2974.56 ; 5025,3964 4997,3992 v1(4984,3992) 4704,3992 4680,3968 4680,3042 ; v1(5109,3594) 5331,3372 5331,3054 5466,2919 5466,2293 v1(5400,2227) ; 4626,2974.56 4626,2988 4680,3042 ; 4626,2974.56 4680,3028.56 4680,3042
  Bottom Layer w10: J2.59@3925.04,2611.54 3989,2611.54 4017.54,2583 4368,2583 4386,2601 4386,2688.5 4330.5,2744 4330.5,2784 4338.75,2792.25 4372.69,2792.25 4444.94,2720 4540.94,2720 4626,2805.06 v1(4626,2879)
FMC_D15: J2.60 U1.98 U3.53 | length 3091.6
  Top Layer w10: U1.98@4459.09,3154.72 4575.72,3154.72 4793.9,3372.9 4793.9,3394 v1(4815,3415.1) ; v1(5290.47,2463) 5390.47,2363 U3.53@5390.47,2312.56
  Layer 2 w10: 4815,3378 v1(4815,3415.1) 4815,3525 4772,3568 4772,3904 4817,3949 4882,3949 4927,3904 4927,3710 4923,3706 ; v1(5290.47,2463) 5274.47,2479 4923,2830.47 4923,3626.17 ; 4923,3626.17 4923,3706 ; 4923,3626.17 4907.5,3641.67 4907.5,3690.5 4923,3706
FMC_NBL0: J2.43 U1.169 U3.15 | length 2841.1
  Top Layer w10: U1.169@3669.11,3905.33 3669.11,3856 3677.11,3848 v1(3743,3848) ; v1(4981.02,2707) U3.15@4981.02,2785
  Layer 2 w10: v1(3743,3848) 3743,3475 v1(3813,3405)
  Bottom Layer w10: v1(3813,3405) 3829,3389 3829,3174.47 3888,3115.47 ; J2.43@3925.04,3115.47 3888,3115.47 ; v1(4981.02,2707) 4981.02,2596.02 4944.5,2559.5 3879.5,2559.5 3869,2570 3869,3115.47 3888,3115.47
FMC_NBL1: J2.44 U1.170 U3.39 | length 4555.5
  Top Layer w10: U1.170@3649.43,3905.33 3649.43,3953.29 v1(3657,3960.86) ; v1(4697,2115) 4860.53,2115 4949.53,2204 U3.39@4949.53,2312.56
  Layer 2 w10: v1(3657,3960.86) 3657,2714.96 4064.96,2307 4384,2307 4448,2371 v1(4448,2783) ; v1(4509,2783) 4509,2303 v1(4697,2115)
  Bottom Layer w10: J2.44@3925.04,3083.98 3998.02,3083.98 4008.5,3073.5 4157.5,3073.5 v1(4448,2783) v1(4509,2783)